# Altium PCB PCB1.PcbDoc
Units mil, origin at the board's own origin, x right, y up, seen from the top; angles counter-clockwise.
Board outline 2130 x 2570 mil, 2 copper layers (Top Layer, Bottom Layer); 62 components, 32 nets, 149 pads, 37 vias.
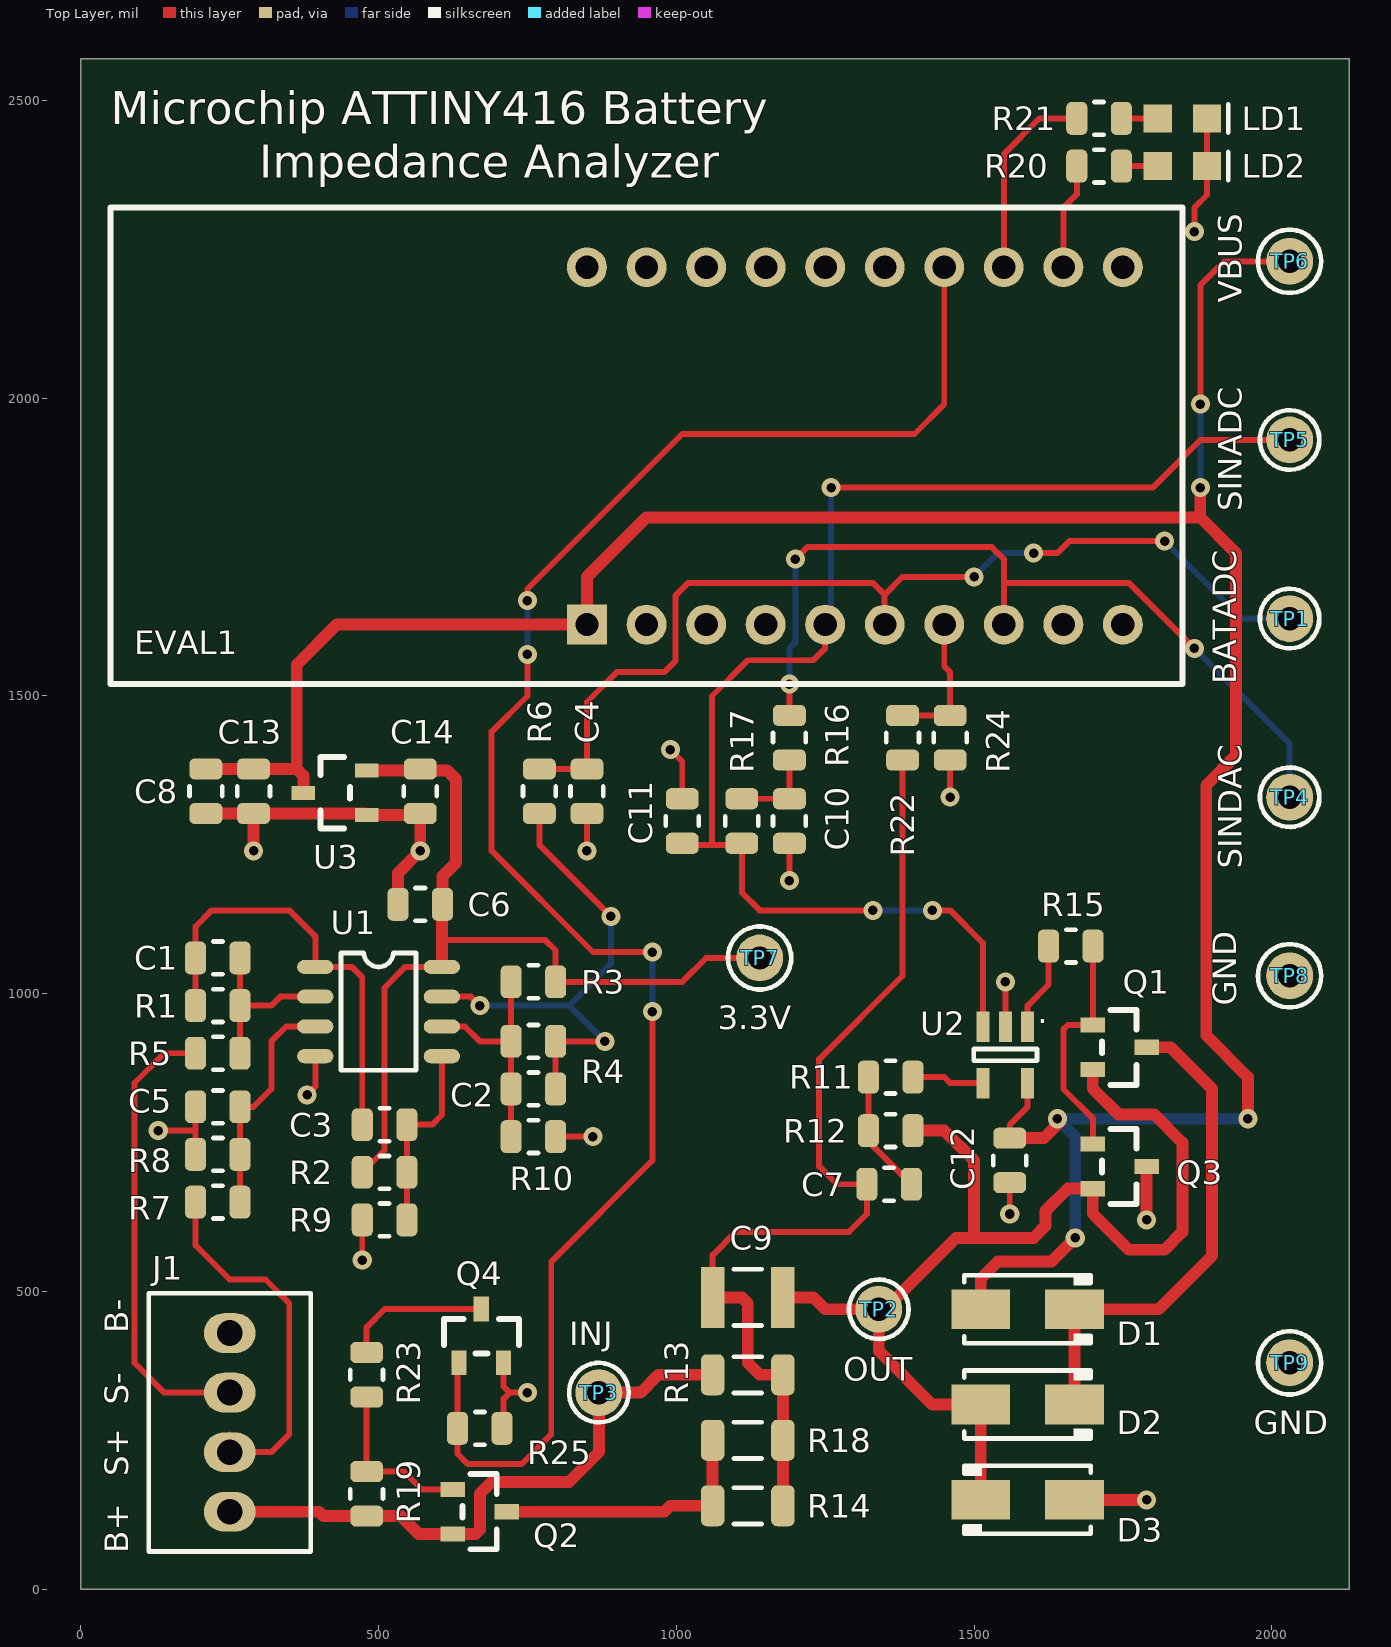
[diagram p0: Top Layer view]
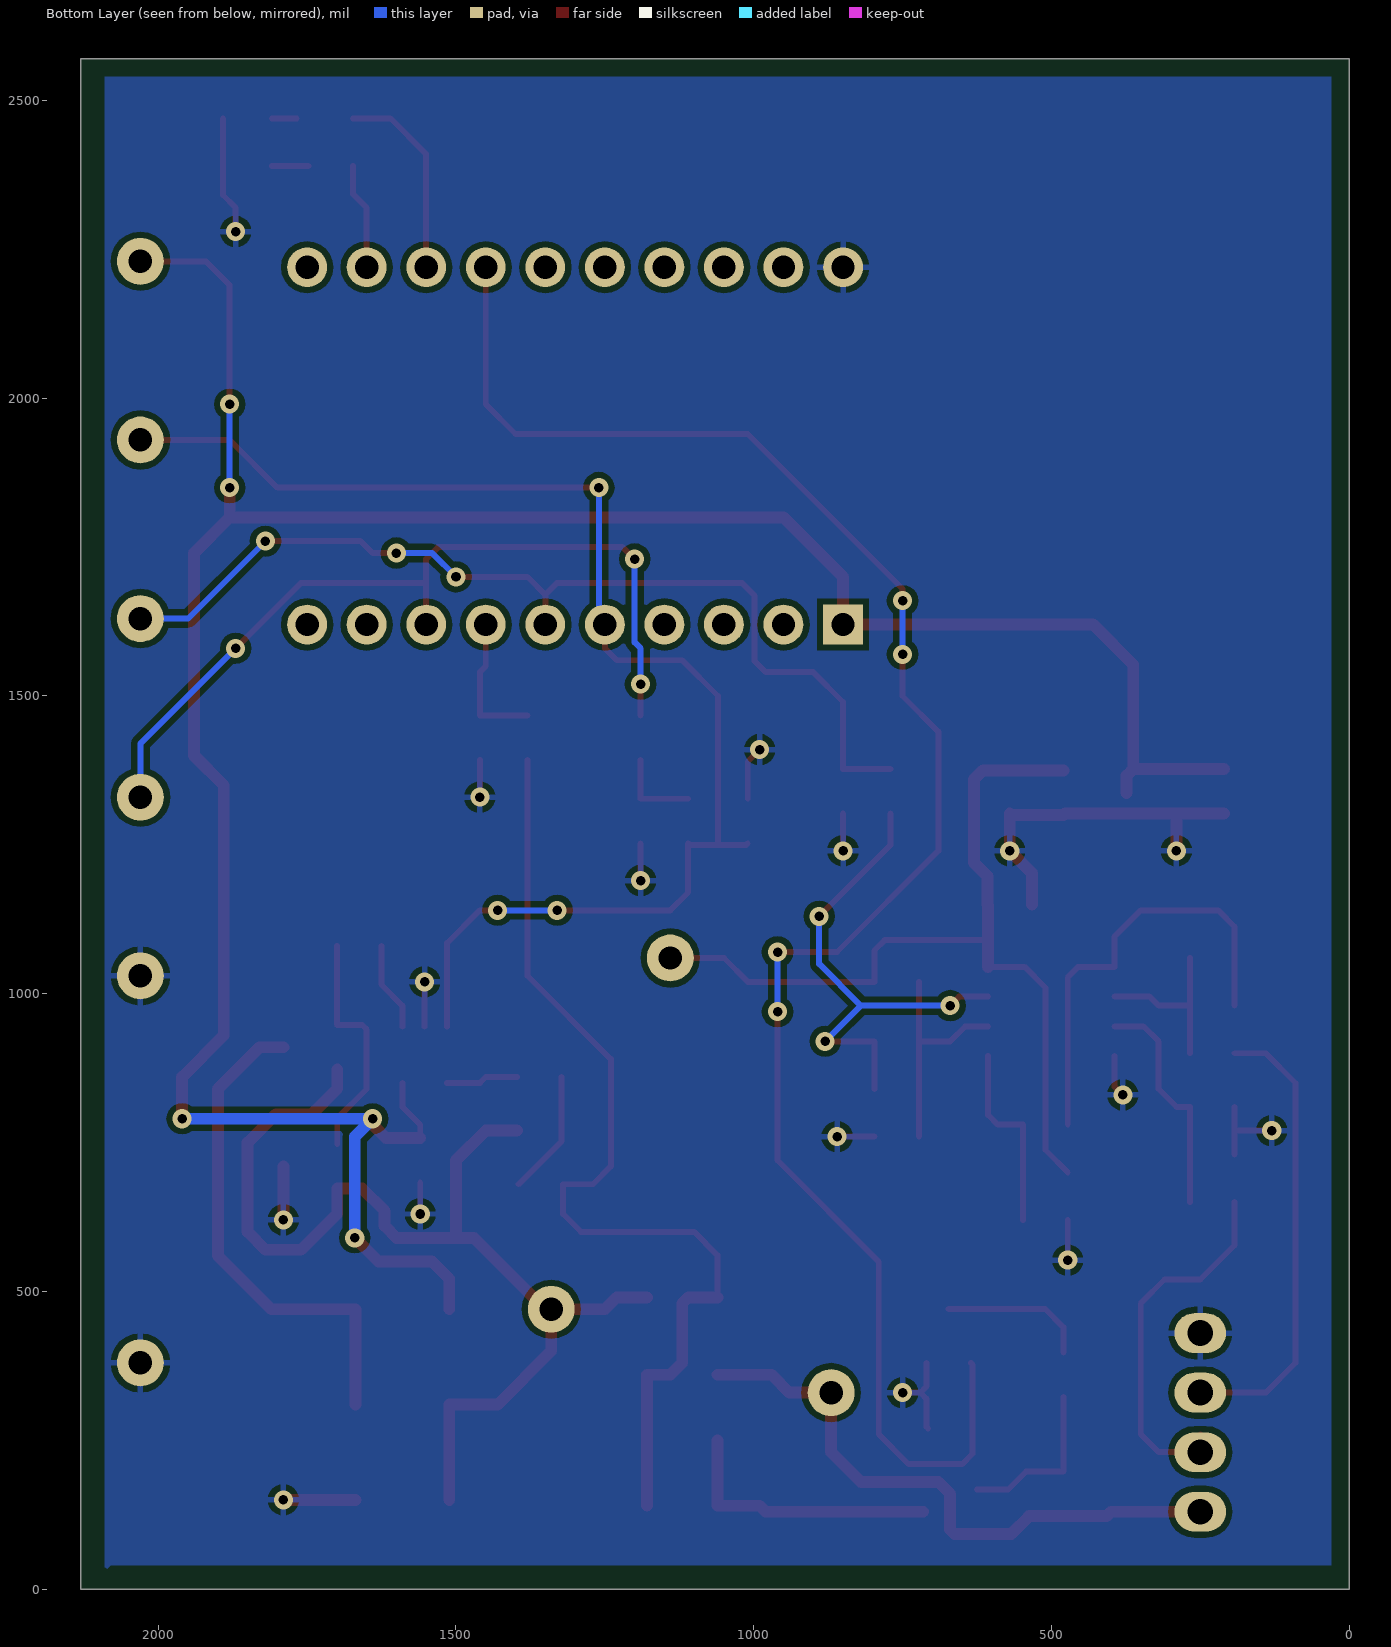
[diagram p1: Bottom Layer view, seen from below]

## Layer stack, top to bottom
Top Solder: solder mask 0.4, Solder Resist, Dk 3.5
Top Layer: signal copper 1.4
Dielectric 1: dielectric 12.6, FR-4, Dk 4.8
Bottom Layer: signal copper 1.4
Bottom Solder: solder mask 0.4, Solder Resist, Dk 3.5

## Board outline
0,0 2130,0 2130,2570 0,2570

## Design rules (kind name [scope] priority, off if disabled: settings)
Clearance [All] p1: gap=10
MinimumSolderMaskSliver [All] p1: minsoldermaskwidth=7
PolygonConnect [All] p1: connectstyle=Relief reliefconductorwidth=10 reliefentries=4 polygonreliefangle="90 Angle" airgapwidth=10
RoutingVias [All] p1: holewidth=28 width=50 viastyle="Through Hole" minholewidth=28 minwidth=50 maxholewidth=28 maxwidth=50
SilkToSilkClearance [All] p1: silktosilkclearance=8
SilkToSolderMaskClearance [IsPad] p1: minsilkscreentomaskgap=5 clearancetoexposedcopper=TRUE
SolderMaskExpansion [All] p1: expansion=4
Width [All] p1: maxlimit=25 minlimit=8 preferedwidth=10
27 further rules are at their usual default settings.

## Components (designator, comment, footprint, x,y, rotation, side; value= is the part's Value field where it differs from the comment)
C1 "Capacitor NP" CAP_C_0805 230,1060 r180 top
C2 "Capacitor NP" CAP_C_0805 760,840 r0 top
C3 "Capacitor NP" CAP_C_0805 510,780 r0 top
C4 "Capacitor NP" CAP_C_0805 850,1340 r270 top
C5 "Capacitor NP" CAP_C_0805 230,810 r180 top
C6 "Capacitor NP" CAP_C_0805 570,1150 r0 top
C7 "Capacitor NP" CAP_C_0805 1357.4,680 r0 top
C8 "Capacitor NP" CAP_C_0805 210,1340 r90 top
C9 "Capacitor NP" CAP_C_1210 1120,490 r180 top
C10 "Capacitor NP" CAP_C_0805 1190,1290 r270 top
C11 "Capacitor NP" CAP_C_0805 1010,1290 r90 top
C12 "Capacitor NP" CAP_C_0805 1560,720 r90 top
C13 "Capacitor NP" CAP_C_0805 290,1340 r90 top
C14 "Capacitor NP" CAP_C_0805 570,1340 r90 top
D1 "Diode Schottky" DO-214AC_SMA 1590,470 r0 top
D2 "Diode Schottky" DO-214AC_SMA 1590,310 r0 top
D3 "Diode Schottky" DO-214AC_SMA 1590,150 r180 top
EVAL1 "ATTINY416_NANO" "ATTINY416 NANO" 850,1620 r0 top
J1 "Header 1x4" CON_TERMINAL_2.54_1x4_TH_RA_PHO_1725672 250,280 r270 top
LD1 "LED_green" LED_0805_Green 1850,2470 r0 top
LD2 "LED_red" LED_0805_Red 1850,2390 r0 top
Q1 "Transistor NPN BEC" SOT-23-3 1744.72,910 r270 top
Q2 "Transistor MOS-P GSD" SOT-23-3 670,130 r270 top
Q3 "Transistor PNP BEC" SOT-23-3 1744.72,710 r270 top
Q4 "Transistor MOS-N GSD" SOT-23-3 672.6,425.28 r0 top
R1 "Resistor" RES_C_0805 230,980 r0 top
R2 "Resistor" RES_C_0805 510,700 r0 top
R3 "Resistor" RES_C_0805 760,1020 r180 top
R4 "Resistor" RES_C_0805 760,920 r0 top
R5 "Resistor" RES_C_0805 230,900 r180 top
R6 "Resistor" RES_C_0805 770,1340 r270 top
R7 "Resistor" RES_C_0805 230,650 r180 top
R8 "Resistor" RES_C_0805 230,730 r180 top
R9 "Resistor" RES_C_0805 510,620 r180 top
R10 "Resistor" RES_C_0805 760,760 r0 top
R11 "Resistor" RES_C_0805 1360,860 r0 top
R12 "Resistor" RES_C_0805 1360,770 r0 top
R13 "Resistor" RES_C_1206 1120,360 r0 top
R14 "Resistor" RES_C_1206 1120,140 r0 top
R15 "Resistor" RES_C_0805 1662.6,1080 r180 top
R16 "Resistor" RES_C_0805 1190,1430 r90 top
R17 "Resistor" RES_C_0805 1110,1290 r90 top
R18 "Resistor" RES_C_1206 1120,250 r0 top
R19 "Resistor" RES_C_0805 480,160 r90 top
R20 "Resistor" RES_C_0805 1710,2390 r0 top
R21 "Resistor" RES_C_0805 1710,2470 r0 top
R22 "Resistor" RES_C_0805 1380,1430 r90 top
R23 "Resistor" RES_C_0805 480,360 r90 top
R24 "Resistor" RES_C_0805 1460,1430 r270 top
R25 "Resistor" RES_C_0805 670,270 r0 top
TP1 "Test Point" CON_TP_TH_V_ORN_KEC_5003 2030,1630 r0 top
TP2 "Test Point" CON_TP_TH_V_ORN_KEC_5003 1340,470 r0 top
TP3 "Test Point" CON_TP_TH_V_ORN_KEC_5003 870,330 r0 top
TP4 "Test Point" CON_TP_TH_V_ORN_KEC_5003 2030,1330 r0 top
TP5 "Test Point" CON_TP_TH_V_ORN_KEC_5003 2030,1930 r0 top
TP6 "Test Point" CON_TP_TH_V_RED_KEC_5000 2030,2230 r0 top
TP7 "Test Point" CON_TP_TH_V_RED_KEC_5000 1140,1060 r0 top
TP8 "Test Point" CON_TP_TH_V_BLK_KEC_5001 2030,1030 r0 top
TP9 "Test Point" CON_TP_TH_V_BLK_KEC_5001 2030,380 r0 top
U1 "MCP6XX2_7 SOIC-8_MSOP-8_PDIP-8" SOIC-8 500,970 r0 top
U2 "MCP6XX1_6 SOT-23-5_SC-70-5" SOT-23-5 1552.6,897.24 r180 top
U3 "MCP1754S SOT-23A-3" SOT-23A-3 426.85,1337.4 r90 top

## Footprints (in the part's own frame and the unit in brackets; to place one, negate y for a bottom-side part, rotate by r counter-clockwise, add the part's x,y. Pads: shape width x height; smd on the part's side, far side on the other; paste and mask are expansions set on the pad)
"ATTINY416 NANO" [mm] "ATTINY416 NANO EVAL BOARD"
  rect 1.7x1.7 hole 1: 1(0,0)
  round 1.7 hole 1: 2(2.54,0) 3(5.08,0) 4(7.62,0) 5(10.16,0) 6(12.7,0) 7(15.24,0) 8(17.78,0) 9(20.32,0) 10(22.86,0) 11(22.86,15.24) 12(20.32,15.24) 13(17.78,15.24) 14(15.24,15.24) 15(12.7,15.24) 16(10.16,15.24) 17(7.62,15.24) 18(5.08,15.24) 19(2.54,15.24) 20(0,15.24)
  silkscreen extent -20.32,-2.54 25.4,17.78
CAP_C_0805 [mm] "Chip Capacitor, 2-Leads, Body 2.0x1.3mm, IPC Medium Density"
  rrect50% 0.9x1.4 smd: 1(-0.95,0) 2(0.95,0)
  silkscreen extent -0.2,-0.7 0.2,0.7, body extent -1,-0.62 1,0.63, height 0.78
CAP_C_1210 [mm] "Chip Capacitor, 2-Leads, Body 3.2x2.5mm, IPC Medium Density"
  rect 1x2.6 smd: 1(-1.5,0) 2(1.5,0)
  silkscreen extent -0.6,-1.2 0.6,1.2, body extent -1.6,-1.25 1.6,1.25, height 0.95
CON_TERMINAL_2.54_1x4_TH_RA_PHO_1725672 [mm] "Terminal Block 2.54mm Pitch 1x4 PHO 1725672"
  oval 1.7x2.2 hole 1.1: 1(-3.81,0) 2(-1.27,0) 3(1.27,0) 4(3.81,0)
  silkscreen extent -5.51,-3.45 5.51,3.45, body extent -5.1,-2.99 5.2,3.23, height 8.64
CON_TP_TH_V_BLK_KEC_5001 [mm] "TEST POINT PC MULTI PURPOSE MINI BLK"
  round 2 hole 1: 1(0,0)
  silkscreen extent -1.35,-1.35 1.35,1.35, body extent -1.27,-1.27 1.27,1.27, height 4.89
CON_TP_TH_V_ORN_KEC_5003 [mm] "TEST POINT PC MULTI PURPOSE MINI ORN"
  round 2 hole 1: 1(0,0)
  silkscreen extent -1.27,-1.27 1.27,1.27, body extent -1.27,-1.27 1.27,1.27, height 4.89
CON_TP_TH_V_RED_KEC_5000 [mm] "TEST POINT PC MULTI PURPOSE MINI RED"
  round 2 hole 1: 1(0,0)
  silkscreen extent -1.35,-1.35 1.35,1.35, body extent -1.27,-1.27 1.27,1.27, height 4.89
DO-214AC_SMA [mm] "Molded Diode, 2-Leads, Body 5.0x2.7mm, IPC Medium Density"
  rect 2.5x1.7 smd: 1(-2,0) 2(2,0)
  silkscreen extent -2.7,-1.5 2.7,1.5, body extent -2.6,-1.3 2.6,1.3, height 2.4
LED_0805_Green [mm]
  rect 1.2x1.2 smd: 1(-1.05,0) 2(1.05,0)
  silkscreen extent 1.95,-0.6 1.95,0.6, body extent -1.01,-0.63 1.01,0.62, height 1.1
LED_0805_Red [mm]
  rect 1.2x1.2 smd: 1(-1.05,0) 2(1.05,0)
  silkscreen extent 1.95,-0.6 1.95,0.6, body extent -1.01,-0.62 1.01,0.63, height 1.1
RES_C_0805 [mm] "Chip Resistor, 2-Leads, Body 2.0x1.3mm, IPC Medium Density"
  rrect50% 0.9x1.4 smd: 1(-0.95,0) 2(0.95,0)
  silkscreen extent -0.2,-0.7 0.2,0.7, body extent -1,-0.63 1,0.63, height 0.78
RES_C_1206 [mm] "Chip Resistor, 2-Leads, Body 3.2x1.6mm, IPC Medium Density"
  rrect50% 1x1.75 smd: 1(-1.5,0) 2(1.5,0)
  silkscreen extent -0.6,-0.77 0.6,0.78, body extent -1.6,-0.8 1.6,0.8, height 1
SOIC-8 [mm] "SOIC, 8-Leads, Overall 4.9x6mm, Pitch 1.27mm, IPC Medium Density"
  oval 1.55x0.6 smd: 1(-2.7,1.905) 2(-2.7,0.635) 3(-2.7,-0.635) 4(-2.7,-1.905) 5(2.7,-1.905) 6(2.7,-0.635) 7(2.7,0.635) 8(2.7,1.905)
  silkscreen extent -1.6,-2.5 1.6,2.5, body extent -3.01,-2.5 3.01,2.5, height 1.75
SOT-23-3 [mm]
  rect 0.65x1.05 smd: 1(-0.95,-1.15) 2(0.95,-1.15) 3(0,1.15)
  silkscreen extent -1.6,-0.75 1.6,0.72, body extent -1.5,-1.25 1.5,1.25, height 1.09
SOT-23-5 [mm] "SOT-23-5"
  rect 0.55x1.3 smd: 1(-0.95,-1.2) 2(0,-1.2) 3(0.95,-1.2) 4(0.95,1.2) 5(-0.95,1.2)
  silkscreen extent -1.35,-0.25 1.35,0.25, body extent -1.5,-1.25 1.5,1.25, height 1.08
SOT-23A-3 [mm]
  rect 0.6x1 smd: 1(-0.95,-1.35) 2(0.95,-1.35) 3(0,1.35)
  silkscreen extent -1.52,-0.65 1.52,0.62, body extent -1.5,-1.25 1.5,1.25, height 1.09

## Part data
C1 C5: library part CAP0606, "Capacitor"
C2: library part CAP0182, "Capacitor"
C3: library part CAP0427, "Capacitor"
C4 C11: library part CAP1264, "Capacitor"
C6 C7 C8 C12 C13: library part CAP0116, "Capacitor"
C9: library part CAP1136, "Capacitor"
C10: library part CAP0264, "Capacitor"
C14: library part CAP0109, "Capacitor"
D1 D2 D3: library part DIODE0128, "DIO SCTKY RB160M-60TR 550mV 1A 60V SMD SOD-123F"
J1: library part CON0005
LD1: library part DIODE1185, "LED"
LD2: library part LED1012, "LED"
Q1: library part TRA0006, "Transistor Bipolar"
Q2: library part TRA1141, "Transistor MOS"
Q3: library part TRA0015, "Transistor Bipolar"
Q4: library part TRA1102, "Transistor MOS"
R1 R8: library part RES1341
R2 R5 R6 R7 R9 R11 R17 R24 R25: library part RSMT0658
R3 R10 R16: library part RES1221
R4: library part RES1223
R12 R19 R22 R23: library part RSMT0157
R13: library part RSMT0007
R14 R18: library part RSMT0060
R15: library part RSMT0594
R20 R21: library part RSMT0085
TP1 TP2 TP3 TP4 TP5: library part CON1282
TP6 TP7: library part MISC0027
TP8 TP9: library part MISC0026
U1: library part MIC0395, "OPAMP"
U2: library part MIC1055, "OPAMP"
U3: library part MIC7325, "LDO"

## Via types
v1: diameter 32, hole 16, Top Layer to Bottom Layer, 37 vias

## Nets (pads, with @x,y where several pads share a name; then routed paths per layer and width w, separated by ;. In a path a pad name is that pad's centre, name@x,y a point inside that pad or via, vN(x,y) a via of type N, cw(c..) or ccw(c..) an arc to the next point about the centre after c; other vN are vias at no path point)
3.3V: C6.2 C14.2 R2.1 R3.1 TP7.1 U1.8 U3.2 | length 1527.3
  Top Layer w10: R2.1 510,737.4 510,1010 545,1045 U1.8 ; 606.3,1090 780,1090 797.4,1072.6 R3.1 1010,1020 1050,1060 TP7.1 ; C6.2@606.3,1148.9 C6.2
  Top Layer w20: U3.2 615.2,1374.8 630,1360 630,1220 607.4,1197.4 C6.2 ; U1.8 606.3,1090 C6.2@606.3,1148.9
BATT_DETECT: EVAL1.7 R22.2 R24.1 | length 236.7
  Top Layer w10: R22.2 R24.1 1460,1540 1450,1550 EVAL1.7
BATT_SNS_ADC: C4.1 EVAL1.6 R6.1 TP1.1 | length 1669.3
  Top Layer w10: R6.1 C4.1 850,1490 900,1540 980,1540 998.46,1558.46 998.46,1668.46 1020,1690 1330,1690 1350,1670 ; EVAL1.6 1350,1670 ; v1(1500,1700) 1380,1700 1350,1670 ; v1(1600,1740) 1640,1740 1660,1760 v1(1820,1760)
  Bottom Layer w10: v1(1500,1700) 1540,1740 v1(1600,1740) ; v1(1820,1760) 1950,1630 TP1.1
DAC_SINE: EVAL1.8 R16.2 TP4.1 | length 1425.1
  Top Layer w10: R16.2 v1(1190,1520) ; v1(1200,1730) 1220,1750 1530,1750 1550,1730 1550,1690 ; EVAL1.8 1550,1690 ; v1(1870,1580) 1760,1690 1550,1690
  Bottom Layer w10: v1(1190,1520) 1190,1580 1200,1590 v1(1200,1730) ; v1(1870,1580) 2030,1420 TP4.1
GND: C4.2 C5.2 C6.1 C8.1 C10.2 C11.2 C12.1 C13.1 C14.1 D3.1 EVAL1.20 J1.1 LD1.2 LD2.2 Q3.3 Q4.2 R8.2 R9.2 R10.2 R24.2 R25.2 TP8.1 TP9.1 U1.4 U2.2 U3.1 | length 1902.4
  Top Layer w10: v1(130,770) 192.6,770 ; R8.2 192.6,770 ; C5.2 192.6,770 ; v1(380,830) 393.7,843.7 U1.4 ; v1(472.6,552.6) R9.2 ; U3.1@477.4,1302.6 U3.1 ; C14.1@567.4,1300 C14.1 ; R25.2 710,272.6 710,320 720,330 ; Q4.2 710,340 720,330 ; v1(750,330) 720,330 ; R10.2 v1(860,760) ; v1(850,1240) C4.2 ; v1(990,1410) 1010,1390 C11.2 ; v1(1190,1190) C10.2 ; v1(1460,1330) R24.2 ; U2.2 v1(1552.6,1020) ; v1(1560,630) C12.1 ; v1(1870,2280) 1870,2320 1891.34,2341.34 LD2.2 LD1.2
  Top Layer w20: C8.1 C13.1 ; v1(290,1240) C13.1 ; U3.1@477.4,1302.6 C13.1 ; U3.1 C14.1@567.4,1300 ; C6.1 532.6,1202.6 v1(570,1240) C14.1 ; D3.1 v1(1790,150) ; v1(1790,620) Q3.3
NetC1_1: C1.1 R1.2 R5.1 U1.2 | length 292.5
  Top Layer w10: R5.1 R1.2 ; C1.1 R1.2 ; U1.2 335,995 320,980 R1.2
NetC1_2: C1.2 C3.1 R1.1 U1.1 | length 748
  Top Layer w10: R1.1 C1.2 192.6,1112.6 220,1140 350,1140 393.7,1096.3 U1.1 455,1045 472.6,1027.4 C3.1
NetC2_1: C2.1 R3.2 R4.1 R10.1 U1.6 | length 386.7
  Top Layer w10: U1.6 645,945 670,920 R4.1 ; R10.1 C2.1 R4.1 ; R3.2 R4.1
NetC2_2: C2.2 R4.2 R6.2 U1.7 | length 868.7
  Top Layer w10: U1.7 655,995 v1(670,980) ; R6.2 770,1250 v1(890,1130) ; C2.2 R4.2 v1(880,920)
  Bottom Layer w10: v1(670,980) 820,980 ; v1(880,920) 820,980 ; v1(890,1130) 890,1050 820,980
NetC3_2: C3.2 R2.2 R9.1 U1.5 | length 324.3
  Top Layer w10: R9.1 R2.2 C3.2 590,780 606.3,796.3 U1.5
NetC5_1: C5.1 R7.1 R8.1 U1.3 | length 389.1
  Top Layer w10: R7.1 R8.1 C5.1 290,810 320,840 320,920 345,945 U1.3
NetC7_1: C7.1 C9.2 R13.2 R14.2 R18.2 R22.1 | length 1692.2
  Top Layer w10: C9.2 1060.94,560.94 1100,600 1290,600 1320,630 C7.1 1270,680 1240,710 1240,890 1380,1030 R22.1
  Top Layer w20: C9.2 1110,490 1120,480 1120,380 1140,360 R13.2 R18.2 R14.2
NetC7_2: C7.2 R11.1 R12.1 | length 209.9
  Top Layer w10: R11.1 R12.1 1322.6,752.2 C7.2
NetC9_1: C9.1 D2.1 D3.2 Q1.2 Q3.2 R12.2 TP2.1 | length 1919.4
  Top Layer w10: TP2.1 TP2.1@1350,470
  Top Layer w20: C9.1 1230,490 1250,470 TP2.1 1340,400 1430,310 D2.1 D3.2 ; TP2.1@1350,470 1470,590 1500,590 ; R12.2 1450,770 1500,720 1500,590 ; Q1.2 1699.45,840.55 1742.6,797.4 1802.6,797.4 1850,750 1850,600 1820,570 1760,570 1699.45,630.55 Q3.2 1657.4,672.6 1620,635.2 1620,610 1600,590 1500,590
NetC10_1: C10.1 R16.1 R17.2 | length 145.2
  Top Layer w10: R17.2 C10.1 R16.1
NetD1_2: D1.2 D2.2 Q1.3 | length 847.5
  Top Layer w20: D2.2 D1.2 1810,470 1900,560 1900,840 1830,910 Q1.3
NetEVAL1_12: EVAL1.12 R20.1 | length 179.4
  Top Layer w10: EVAL1.12 1650,2320 1672.6,2342.6 R20.1
NetEVAL1_13: EVAL1.13 R21.1 | length 337.5
  Top Layer w10: EVAL1.13 1550,2410 1610,2470 R21.1
NetJ1_4: J1.4 Q2.2 R13.1 R19.1 TP3.1 | length 1030.9
  Top Layer w20: J1.4 400,130 407.4,122.6 R19.1 537.4,122.6 567.4,92.6 Q2.2 662.6,92.6 670,100 670,160 690,180 820,180 870,230 TP3.1 940,330 970,360 R13.1
NetLD1_1: LD1.1 R21.2 | length 41.3
  Top Layer w10: 1767.4,2470 LD1.1
NetLD2_1: LD2.1 R20.2 | length 61.3
  Top Layer w10: R20.2 LD2.1
NetQ1_1: Q1.1 Q3.1 R15.1 | length 398.4
  Top Layer w10: Q3.1 1699.45,790.55 1650,840 1650,940 1657.4,947.4 Q1.1 1700,947.95 R15.1
NetQ2_1: Q2.1 R19.2 R23.1 | length 282.3
  Top Layer w10: R23.1 R19.2 542.6,197.4 572.6,167.4 Q2.1
NetQ2_3: Q2.3 R14.1 R18.1 | length 459.8
  Top Layer w20: Q2.3 980,130 990,140 R14.1 R18.1
NetQ4_3: Q4.3 R23.2 | length 247.9
  Top Layer w10: R23.2 480,440 510.55,470.55 Q4.3
NetR11_2: R11.2 U2.4 | length 121.9
  Top Layer w10: R11.2 1450,860 1460,850 U2.4
NetR15_2: R15.2 U2.1 | length 150.1
  Top Layer w10: U2.1 1590,980 1625.2,1015.2 R15.2
SINE_ADC: C11.1 EVAL1.5 R17.1 TP5.1 U2.3 | length 2316
  Top Layer w10: C11.1 1012.6,1250 1060,1250 ; EVAL1.5 1250,1580 1230,1560 1120,1560 1060,1500 1060,1250 ; v1(1260,1850) 1800,1850 1880,1930 TP5.1 ; v1(1330,1140) 1140,1140 1110,1170 R17.1 1107.4,1250 1060,1250 ; v1(1430,1140) 1460,1140 1515.2,1084.8 U2.3
  Bottom Layer w10: EVAL1.5 1260,1630 v1(1260,1850) ; v1(1330,1140) v1(1430,1140)
SNS+: J1.3 R7.2 | length 645.2
  Top Layer w10: R7.2 192.6,577.4 250,520 310,520 350,480 350,260 320,230 J1.3 ; J1.3@220,230 J1.3@250,260
SNS-: J1.2 R5.2 | length 774
  Top Layer w10: R5.2 140,900 90,850 90,380 140,330 J1.2
TEST_EN: EVAL1.14 Q4.1 R25.1 | length 3073.1
  Top Layer w10: Q4.1 632.6,377.4 R25.1 632.6,227.4 650,210 740,210 790,260 790,550 960,720 v1(960,970) ; v1(750,1570) 750,1500 690,1440 690,1240 860,1070 v1(960,1070) ; v1@750,1670 750,1680 1010,1940 1400,1940 1450,1990 EVAL1.14
  Bottom Layer w10: v1(750,1570) v1(750,1660) ; v1(960,970) v1(960,1070)
VCC: C8.2 C12.2 C13.2 D1.1 EVAL1.1 TP6.1 U2.5 U3.3 | length 4655.5
  Top Layer w10: C12.2 1560,780 1590,810 U2.5 ; v1@1640,780 v1(1640,790) ; v1(1880,1990) 1880,2190 1920,2230 TP6.1
  Top Layer w20: C8.2 C13.2 362.6,1377.4 ; U3.3 373.7,1366.3 362.6,1377.4 ; D1.1 1511.26,521.26 1540,550 1630,550 v1(1670,590) ; C12.2 1617.4,757.4 v1@1640,780 ; v1(1880,1850) 1880,1800 ; v1(1960,790) 1960,860 1890,930 1890,1350 1940,1400 1940,1740 1880,1800 ; 362.6,1377.4 362.6,1552.6 430,1620 EVAL1.1 850,1700 950,1800 1880,1800
  Bottom Layer w10: v1(1880,1850) v1(1880,1990)
  Bottom Layer w20: v1(1670,590) 1670,760 v1(1640,790) v1(1960,790)
pads on no net: EVAL1.2 EVAL1.3 EVAL1.4 EVAL1.9 EVAL1.10 EVAL1.11 EVAL1.15 EVAL1.16 EVAL1.17 EVAL1.18 EVAL1.19

## Polygon pours and split planes (outlines as drawn)
GND on Bottom Layer "Bottom Layer-No Net" (solid, remove dead copper, pour order 0): 30,2540 2090,2540 2090,30 2080,40 30,40

## Silkscreen, mask and mechanical layers (free items; w line width, h text height)
Top Overlay:
  text "Microchip ATTINY416 Battery" at 50,2460 h55
  text "Impedance Analyzer" at 300,2370 h55
  text "VBUS" at 1950,2160 h40 r90
  text "SINADC" at 1950,1810 h40 r90
  text "BATADC" at 1940,1520 h40 r90
  text "SINDAC" at 1950,1210 h40 r90
  text "GND" at 1940,980 h40 r90
  text "3.3V" at 1070,940 h40
  text "B-" at 80,430 h40 r90
  text "INJ" at 820,410 h40
  text "OUT" at 1280,350 h40
  text "S-" at 80,310 h40 r90
  text "GND" at 1970,260 h40
  text "S+" at 80,190 h40 r90
  text "B+" at 80,60 h40 r90
Mechanical 1:
  the board outline again, w10

## Dimensions
0,2570 to 0,0 on Top Layer
0,0 to 2130,0 on Top Layer

## Text inside footprints (layer, text, board x,y; h text height)
J1: Mechanical 11 "1" at 234.25,437.48 h39.37 r270
U2: Mechanical 11 "1" at 1611.65,946.45 h19.68 r180